# Altium PCB 4-Port_USB_HUB_PCB.PcbDoc
Units mm, origin at the board's own origin, x right, y up, seen from the top; angles counter-clockwise.
Board outline 70.66 x 70.66 mm, 2 copper layers (Top Layer, Bottom Layer), stack 1.569 mm thick; 29 components, 18 nets, 124 pads, 45 vias.
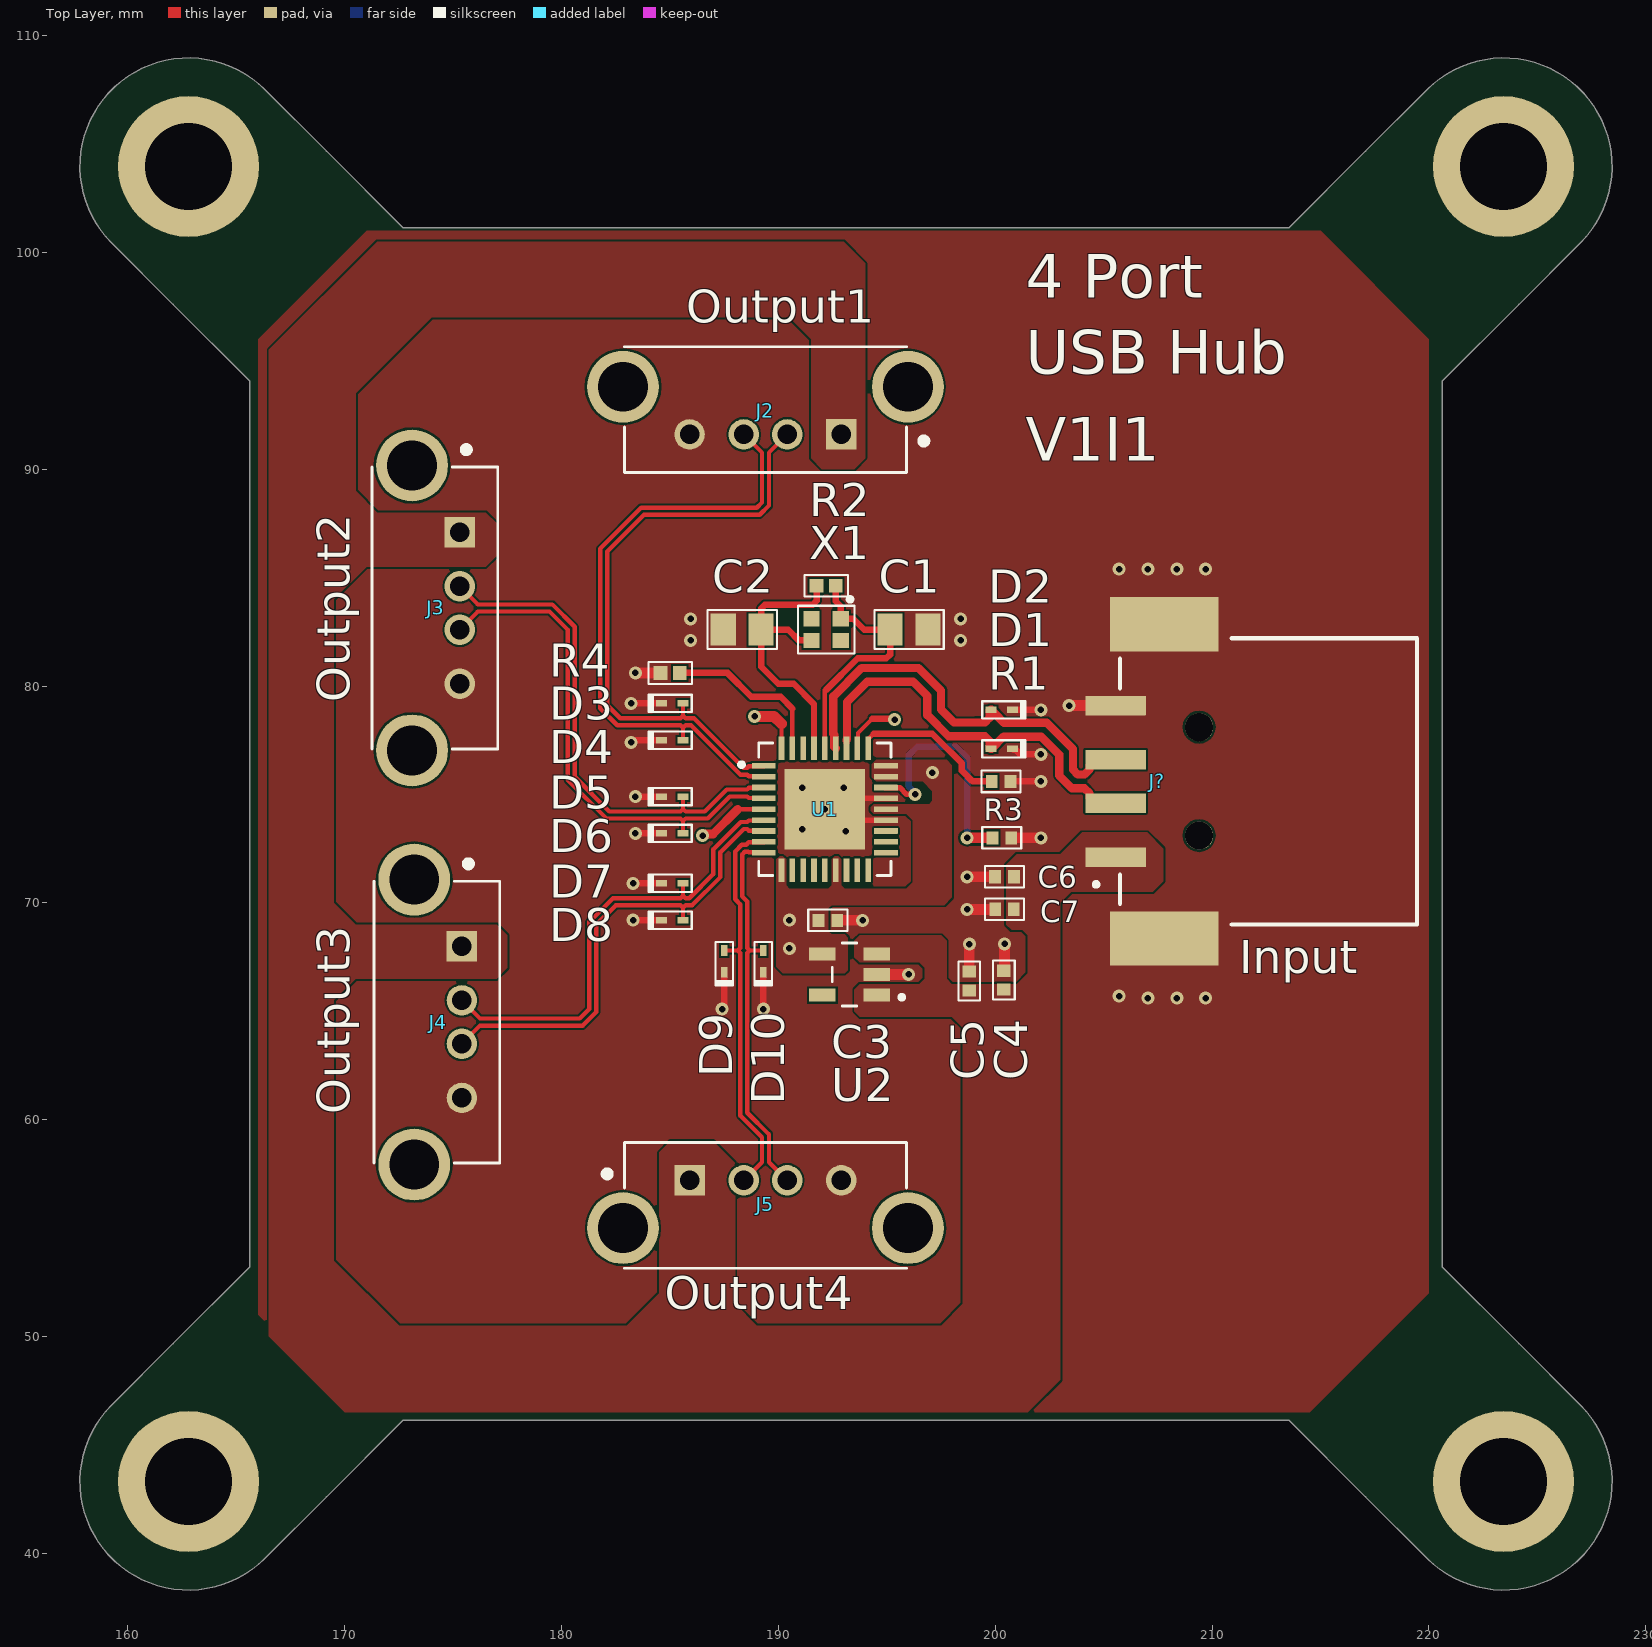
[diagram p0: Top Layer view]
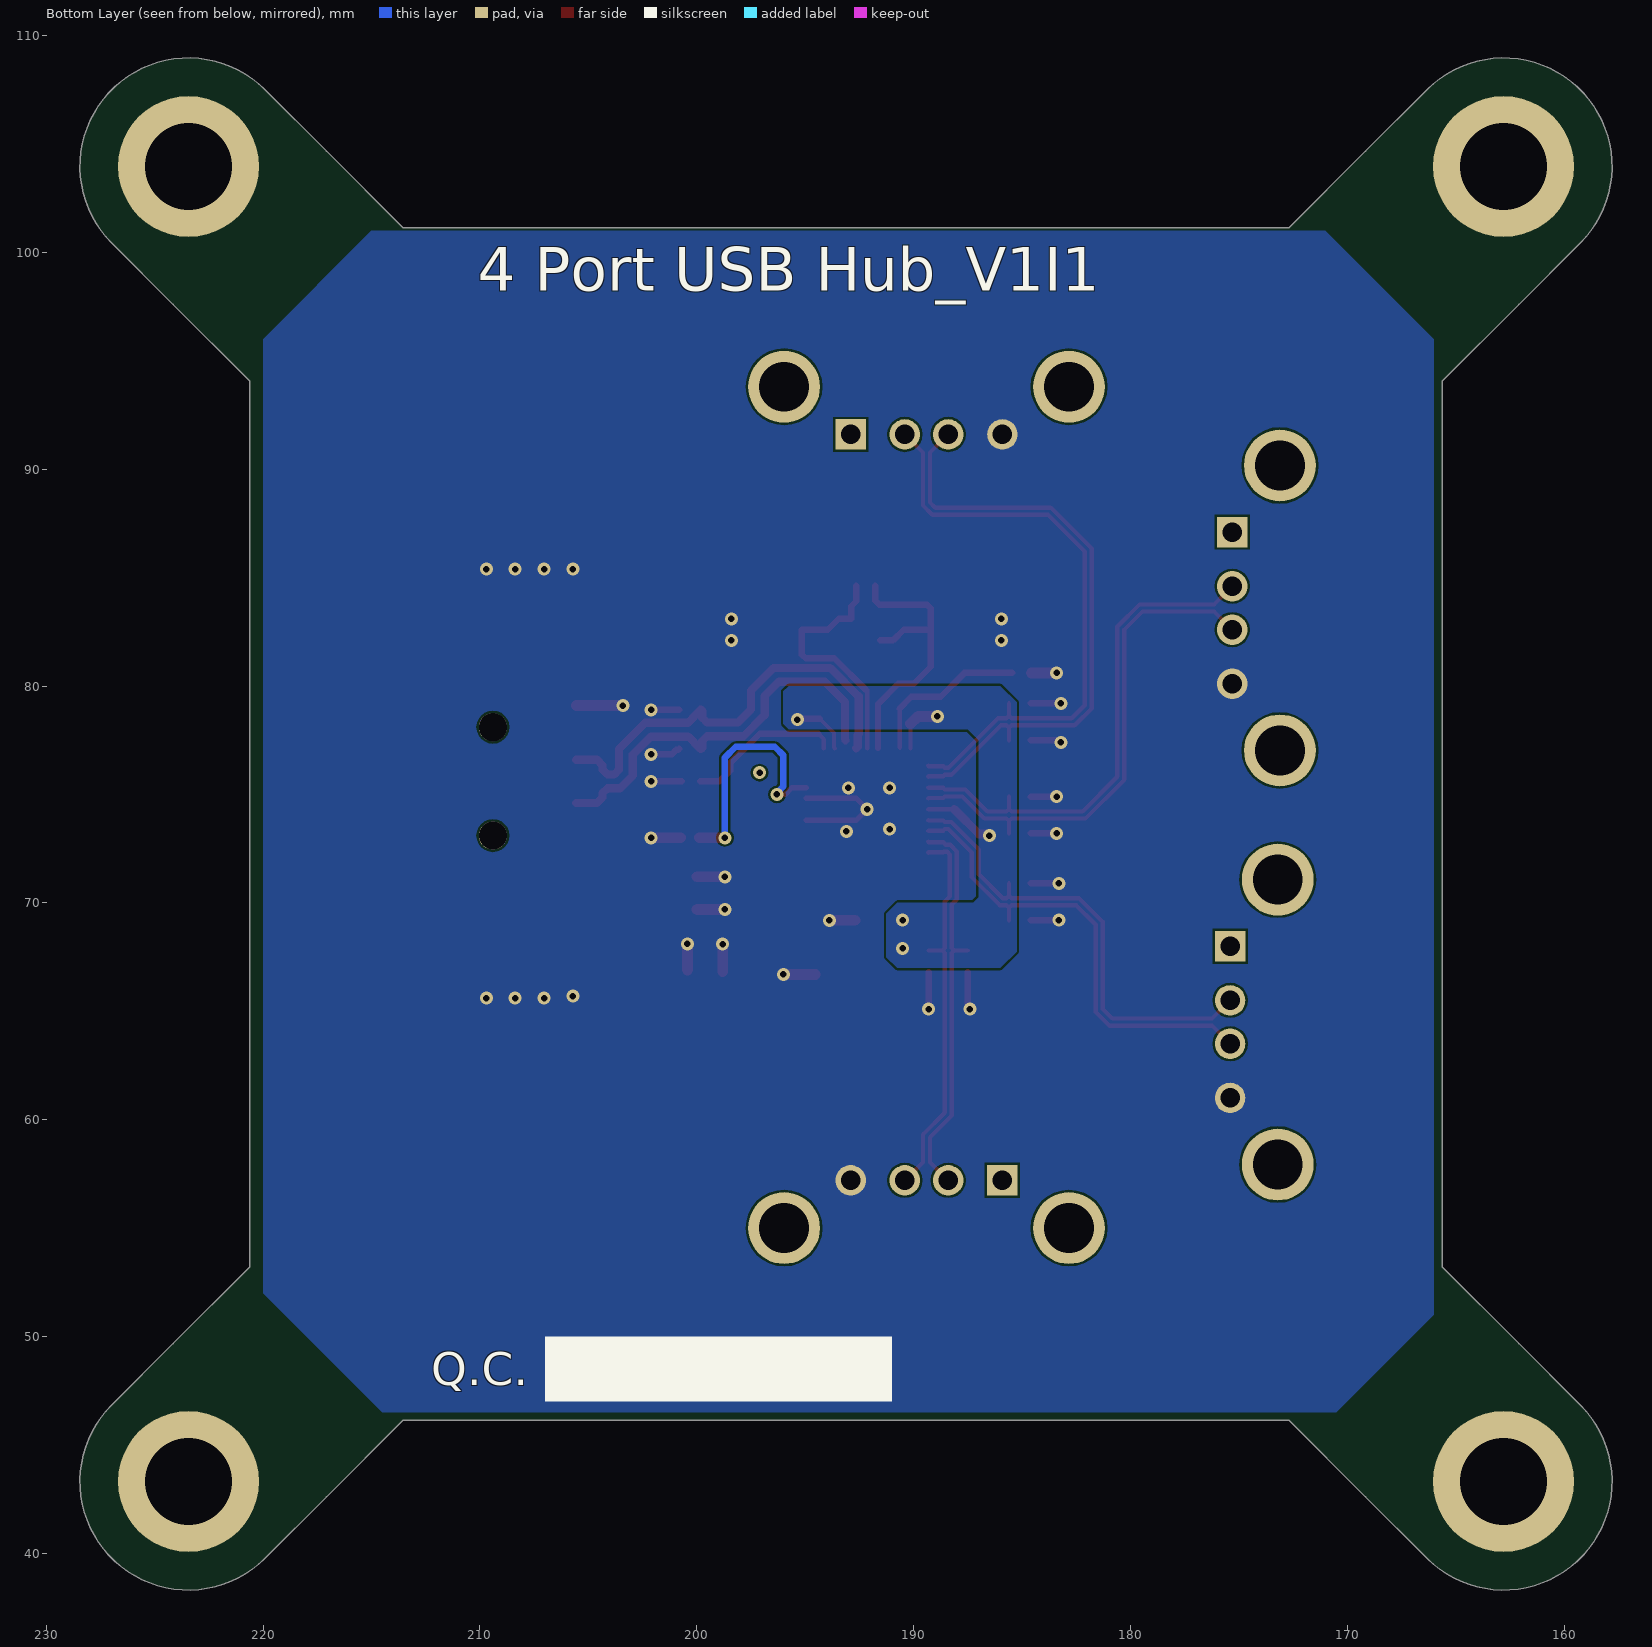
[diagram p1: Bottom Layer view, seen from below]
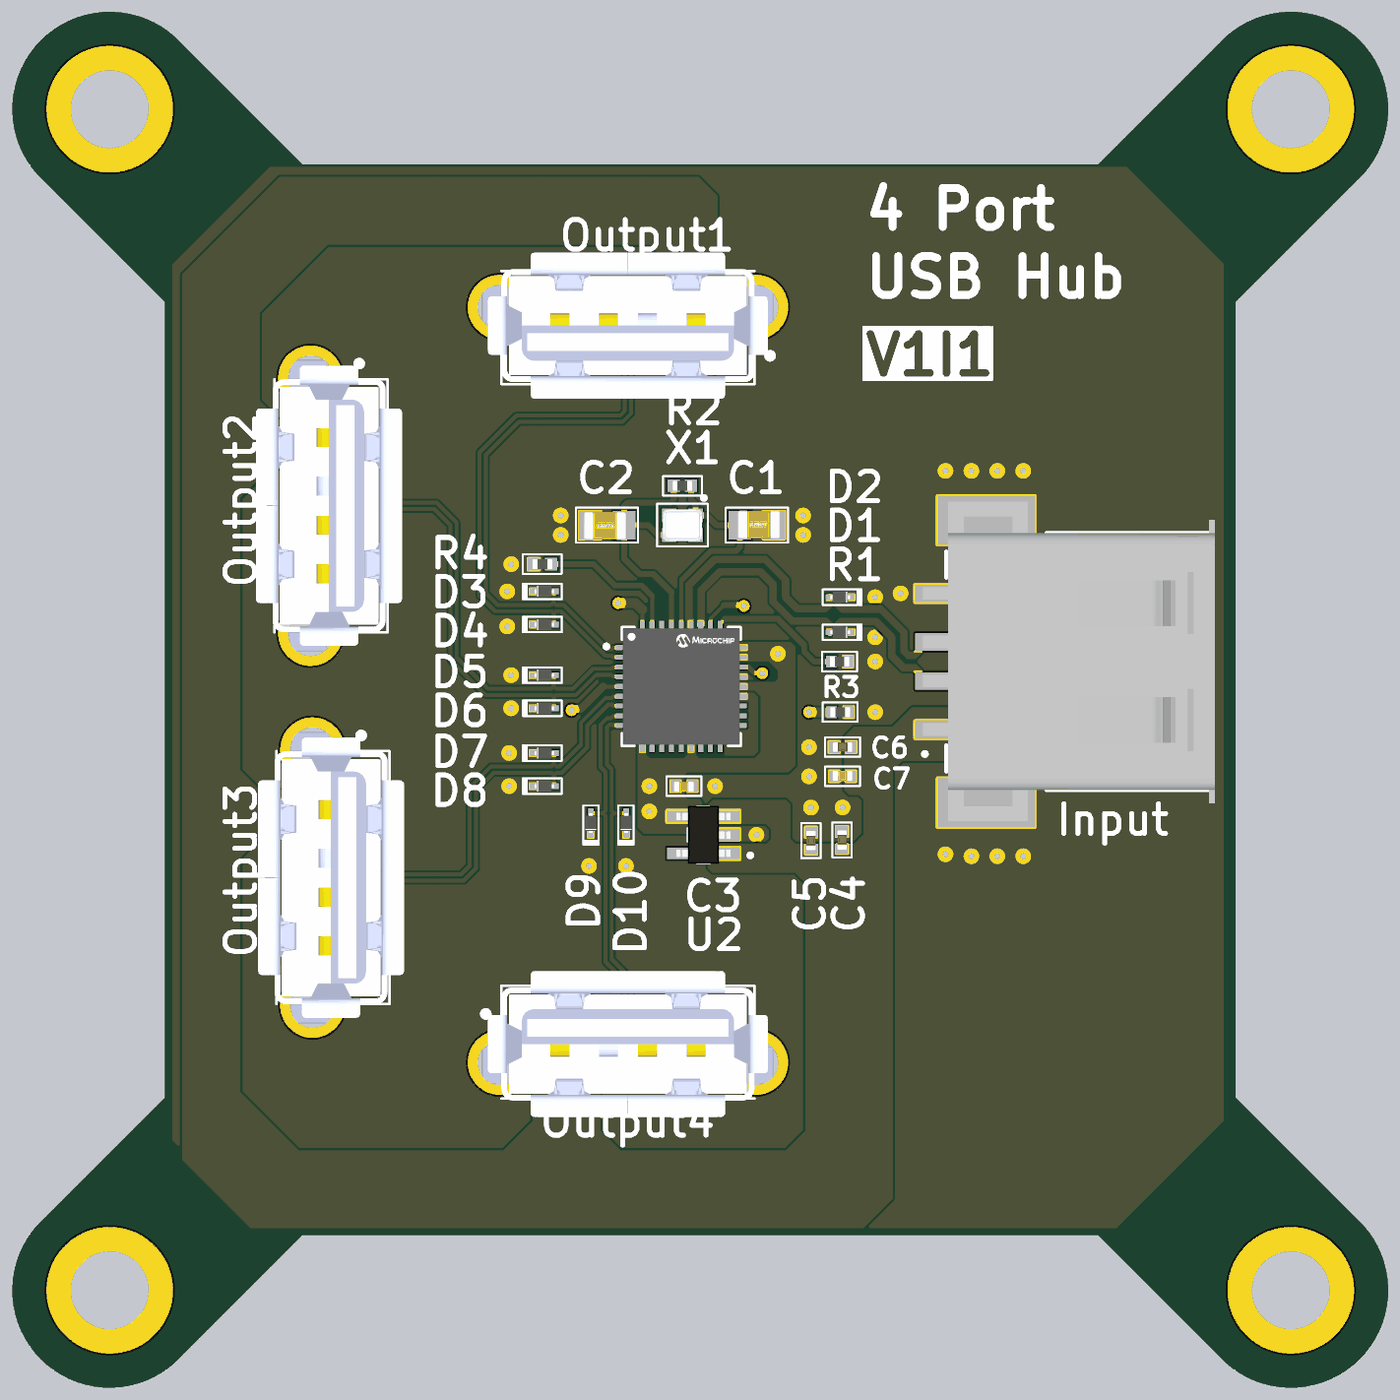
[diagram p2: 3D render of the assembled board from above, using the file's embedded part models]

## Layer stack, top to bottom
Top Solder: solder mask 0.0254, SM-001, Dk 4
Top Layer: signal copper 0.035
Dielectric 1: core 1.4986, Core-043, Dk 4.3
Bottom Layer: signal copper 0.035
Bottom Solder: solder mask 0.0254, SM-001, Dk 4

## Board outline
159.25,46.843 ccw(c162.786,43.307) 166.321,39.772 169.15,42.6 172.685,46.136 213.543,46.136 217.078,42.6 219.907,39.772 ccw(c223.442,43.307) 226.978,46.843 224.15,49.671 220.614,53.207 220.614,94.065 224.15,97.6 226.978,100.429 ccw(c223.442,103.964) 219.907,107.5 217.078,104.671 213.543,101.136 172.685,101.136 169.15,104.671 166.321,107.5 ccw(c162.786,103.964) 159.25,100.429 162.078,97.6 165.614,94.065 165.614,53.207 162.078,49.671

## Design rules (kind name [scope] priority, off if disabled: settings)
Clearance [All] p1: gap=0.1 ignorepadtopadclearanceinfootprint=FALSE
DiffPairsRouting DiffPair_DiffPairsRouting [InDifferentialPairClass('diff90')] p1: maxlimit=0.254 minlimit=0.254 mostfreqgap=0.254 toplayer_minwidth=0.381 toplayer_maxwidth=0.381 toplayer_prefwidth=0.381 bottomlayer_minwidth=0.381 bottomlayer_maxwidth=0.381 bottomlayer_prefwidth=0.381 maxuncoupledlength=12.7
DiffPairsRouting DiffPair_diff4_90DiffPairsRouting [InDifferentialPairClass('diff4_90')] p2: maxlimit=0.125 minlimit=0.125 mostfreqgap=0.125 toplayer_minwidth=0.2 toplayer_maxwidth=0.2 toplayer_prefwidth=0.2 bottomlayer_minwidth=0.2 bottomlayer_maxwidth=0.2 bottomlayer_prefwidth=0.2 maxuncoupledlength=12.7
DiffPairsRouting DiffPair_diff3_90DiffPairsRouting [InDifferentialPairClass('diff3_90')] p3: maxlimit=0.125 minlimit=0.125 mostfreqgap=0.125 toplayer_minwidth=0.2 toplayer_maxwidth=0.2 toplayer_prefwidth=0.2 bottomlayer_minwidth=0.2 bottomlayer_maxwidth=0.2 bottomlayer_prefwidth=0.2 maxuncoupledlength=12.7
DiffPairsRouting DiffPair_diff2_90DiffPairsRouting [InDifferentialPairClass('diff2_90')] p4: maxlimit=0.125 minlimit=0.125 mostfreqgap=0.125 toplayer_minwidth=0.2 toplayer_maxwidth=0.2 toplayer_prefwidth=0.2 bottomlayer_minwidth=0.2 bottomlayer_maxwidth=0.2 bottomlayer_prefwidth=0.2 maxuncoupledlength=12.7
DiffPairsRouting DiffPair_diff1_90DiffPairsRouting [InDifferentialPairClass('diff1_90')] p5: maxlimit=0.125 minlimit=0.125 mostfreqgap=0.125 toplayer_minwidth=0.2 toplayer_maxwidth=0.2 toplayer_prefwidth=0.2 bottomlayer_minwidth=0.2 bottomlayer_maxwidth=0.2 bottomlayer_prefwidth=0.2 maxuncoupledlength=12.7
DiffPairsRouting DiffPair_diff90DiffPairsRouting [InDifferentialPairClass('diff90')] p6: maxlimit=0.127 minlimit=0.127 mostfreqgap=0.127 toplayer_minwidth=0.552 toplayer_maxwidth=0.552 toplayer_prefwidth=0.58 bottomlayer_minwidth=0.552 bottomlayer_maxwidth=0.552 bottomlayer_prefwidth=0.58 impedanceprofiledriven=TRUE maxuncoupledlength=12.7
DiffPairsRouting DiffPairsRouting_1 [InDifferentialPairClass('diff90')] p7: maxlimit=0.254 minlimit=0.254 mostfreqgap=0.254 toplayer_minwidth=0.381 toplayer_maxwidth=0.381 toplayer_prefwidth=0.381 bottomlayer_minwidth=0.381 bottomlayer_maxwidth=0.381 bottomlayer_prefwidth=0.381 maxuncoupledlength=12.7
DiffPairsRouting DiffPair_diff90DiffPairsRouting_1 [InDifferentialPairClass('diff90')] p8 off: maxlimit=0.127 minlimit=0.127 mostfreqgap=0.127 toplayer_minwidth=0.55 toplayer_maxwidth=0.55 toplayer_prefwidth=0.55 bottomlayer_minwidth=0.55 bottomlayer_maxwidth=0.55 bottomlayer_prefwidth=0.55 maxuncoupledlength=12.7
DiffPairsRouting [All] p9: maxlimit=0.254 minlimit=0.254 mostfreqgap=0.254 toplayer_minwidth=0.381 toplayer_maxwidth=0.381 toplayer_prefwidth=0.381 bottomlayer_minwidth=0.381 bottomlayer_maxwidth=0.381 bottomlayer_prefwidth=0.381 maxuncoupledlength=12.7
HoleToHoleClearance [All] p1: gap=0.1 allowstackedmicrovias=TRUE
MatchedLengths DiffPair_MatchedLengths [InDifferentialPairClass('diff90')] p1: tolerance=25.4 checknetsindiffpair=FALSE checkdiffpairvsdiffpair=TRUE checkxsignals=TRUE checkothers=TRUE
MatchedLengths DiffPair_diff4_90MatchedLengths [InDifferentialPairClass('diff4_90')] p2: tolerance=25.4 checknetsindiffpair=FALSE checkdiffpairvsdiffpair=TRUE checkxsignals=TRUE checkothers=TRUE
MatchedLengths DiffPair_diff3_90MatchedLengths [InDifferentialPairClass('diff3_90')] p3: tolerance=25.4 checknetsindiffpair=FALSE checkdiffpairvsdiffpair=TRUE checkxsignals=TRUE checkothers=TRUE
MatchedLengths DiffPair_diff2_90MatchedLengths [InDifferentialPairClass('diff2_90')] p4: tolerance=25.4 checknetsindiffpair=FALSE checkdiffpairvsdiffpair=TRUE checkxsignals=TRUE checkothers=TRUE
MatchedLengths DiffPair_diff1_90MatchedLengths [InDifferentialPairClass('diff1_90')] p5: tolerance=25.4 checknetsindiffpair=FALSE checkdiffpairvsdiffpair=TRUE checkxsignals=TRUE checkothers=TRUE
MatchedLengths DiffPair_diff90MatchedLengths [InDifferentialPairClass('diff90')] p6: tolerance=25.4 checknetsindiffpair=FALSE checkdiffpairvsdiffpair=TRUE checkxsignals=TRUE checkothers=TRUE
MatchedLengths [InDifferentialPairClass('diff90')] p7: tolerance=25.4 checknetsindiffpair=FALSE checkdiffpairvsdiffpair=TRUE checkxsignals=TRUE checkothers=TRUE
MatchedLengths DiffPair_diff90MatchedLengths_1 [InDifferentialPairClass('diff90')] p8 off: tolerance=25.4 checknetsindiffpair=FALSE checkdiffpairvsdiffpair=TRUE checkxsignals=TRUE checkothers=TRUE
MinimumSolderMaskSliver [All] p1: minsoldermaskwidth=0.1
PolygonConnect [All] p1: connectstyle=Direct reliefconductorwidth=0.254 reliefentries=4 polygonreliefangle="90 Angle" airgapwidth=0.254
RoutingVias [All] p1: holewidth=0.3 width=0.6 viastyle="Through Hole" minholewidth=0.3 minwidth=0.6 maxholewidth=0.3 maxwidth=0.6
SilkToSilkClearance [All] p1: silktosilkclearance=0.1
SilkToSolderMaskClearance [IsPad] p1: minsilkscreentomaskgap=0.1 clearancetoexposedcopper=TRUE
SolderMaskExpansion [All] p1: expansion=0.102 istentingtop=FALSE
Width [All] p1: maxlimit=10 minlimit=0.1 preferedwidth=0.254
25 further rules are at their usual default settings.

## Classes and differential pairs
differential pair class diff4_90: Out4
differential pair class diff3_90: Out3
differential pair class diff2_90: Out2
differential pair class diff1_90: Out1
differential pair class diff90: IN
differential pair Out4: +Out4_P -Out4_N
differential pair Out3: +Out3_P -Out3_N
differential pair Out2: +Out2_P -Out2_N
differential pair Out1: +Out1_P -Out1_N
differential pair IN: +IN_P -IN_N

## Components (designator, comment, footprint, x,y, rotation, side; value= is the part's Value field where it differs from the comment)
C1 "18pF,50V" 18pF 196.025,82.6 r0 top
C2 "18pF,50V" 18pF 188.325,82.6 r180 top
C3 "1uF,6.3V" 1uF_CAP 192.276,69.196 r0 top
C4 "4.7uF,6.3V" 4.7uF_CAP 200.397,66.435 r90 top
C5 "4.7uF,6.3V" 4.7uF_CAP 198.8,66.4 r90 top
C6 "4.7uF,6.3V" 4.7uF_CAP 200.424,71.204 r180 top
C7 "1uF,6.3V" 1uF_CAP 200.424,69.704 r180 top
D1 "TVS" "ESD Diode" 200.3,77.1 r180 top
D2 "TVS" "ESD Diode" 200.3,78.9 r180 top
D3 "TVS" "ESD Diode" 185.1,79.2 r0 top
D4 "TVS" "ESD Diode" 185.1,77.5 r0 top
D5 "TVS" "ESD Diode" 185.1,74.9 r0 top
D6 "TVS" "ESD Diode" 185.1,73.2 r0 top
D7 "TVS" "ESD Diode" 185.1,70.9 r0 top
D8 "TVS" "ESD Diode" 185.1,69.2 r0 top
D9 "TVS" "ESD Diode" 187.5,67.3 r90 top
D10 "TVS" "ESD Diode" 189.3,67.3 r90 top
J2 "USB-A" USB_Connector 192.9,91.6 r180 top
J3 "USB-A" USB_Connector 175.3,87.1 r270 top
J4 "USB-A" USB_Connector 175.4,68 r270 top
J5 "USB-A" USB_Connector 185.9,57.2 r0 top
J? "SMD USB-A" "SMD USB-A" 209.4,75.6 r90 top
R1 "56K" 56K 200.268,75.6 r0 top
R2 "1M" "1M Res" 192.2,84.625 r270 top
R3 "56K" 56K 200.3,73 r0 top
R4 "12K" "1M Res" 185.005,80.6 r270 top
U1 "USB2514B-I/M2" IC_microchip 192.138,74.316 r0 top
U2 "MIC5504-3.3YM5-TR" "Voltage Regulator" 193.276,66.696 r180 top
X1 "24MHz" Crystal 192.2,82.6 r270 top

## Footprints (in the part's own frame and the unit in brackets; to place one, negate y for a bottom-side part, rotate by r counter-clockwise, add the part's x,y. Pads: shape width x height; smd on the part's side, far side on the other; paste and mask are expansions set on the pad)
"1M Res" [mil]
  rect 25x25 smd mask+2: 1(0,17.5) 2(0,-17.5)
  silkscreen extent -20,-39 20,39, body extent -10,-20 10,20, height 16
1uF_CAP [mm]
  rect 0.54x0.6 smd mask+0.051: 1(-0.43,0) 2(0.43,0)
  silkscreen extent -0.9,-0.5 0.9,0.5, body extent -0.52,-0.3 0.52,0.25, height 0.55
4.7uF_CAP [mm]
  rect 0.56x0.63 smd mask+0.051: 1(-0.435,0) 2(0.435,0)
  silkscreen extent -0.9,-0.5 0.9,0.5, body extent -0.5,-0.25 0.5,0.25, height 0.6
18pF [mm]
  rect 1.16x1.47 smd mask+0.051: 1(-0.875,0) 2(0.875,0)
  silkscreen extent -1.6,-0.9 1.6,0.9, body extent -1,-0.7 1.2,0.75, height 0.92
56K [mm]
  rect 0.54x0.6 smd mask+0.051: 1(-0.432,0) 2(0.432,0)
  silkscreen extent -0.9,-0.5 0.9,0.5, body extent -0.5,-0.25 0.5,0.25, height 0.4
Crystal [mm]
  rect 0.7x0.75 smd mask+0.051: 1(-0.5,0.675) 2(-0.5,-0.675) 3(0.5,-0.675) 4(0.5,0.675)
  silkscreen extent -1.5,-1.3 1.1,1.3, body extent -0.8,-1 0.8,1, height 0.7
"ESD Diode" [mm]
  rect 0.5x0.3 smd mask+0.051: 1(-0.5,0) 2(0.5,0)
  silkscreen extent -1.1,-0.4 0.9,0.4, body extent -0.5,-0.3 0.5,0.3, height 0.4
IC_microchip [mm]
  rrect7% 1.1x0.26 smd mask+0.051: 1(-2.815,2) 2(-2.815,1.5) 3(-2.815,1) 4(-2.815,0.5) 5(-2.815,0) 6(-2.815,-0.5) 7(-2.815,-1) 8(-2.815,-1.5) 9(-2.815,-2) 19(2.815,-2) 20(2.815,-1.5) 21(2.815,-1) 22(2.815,-0.5) 23(2.815,0) 24(2.815,0.5) 25(2.815,1) 26(2.815,1.5) 27(2.815,2)
  rrect7% 0.26x1.1 smd mask+0.051: 10(-2,-2.815) 11(-1.5,-2.815) 12(-1,-2.815) 13(-0.5,-2.815) 14(0,-2.815) 15(0.5,-2.815) 16(1,-2.815) 17(1.5,-2.815) 18(2,-2.815) 28(2,2.815) 29(1.5,2.815) 30(1,2.815) 31(0.5,2.815) 32(0,2.815) 33(-0.5,2.815) 34(-1,2.815) 35(-1.5,2.815) 36(-2,2.815)
  rect 3.7x3.7 smd paste-3 mask+0.051: 37(0,0)
  silkscreen extent -3.94,-3.05 3.05,3.05, body extent -3,-3 3,3, height 1
"SMD USB-A" [mm]
  rrect4% 0.9x2.8 smd: 1(-3.5,3.85) 2(-1,3.85) 3(1,3.85) 4(3.5,3.85)
  rect 2.5x5 smd: S1(-7.25,1.6) S2(7.25,1.6)
  round 1.3 hole 1.3 unplated: ""(-2.5,0) ""(2.5,0)
  silkscreen extent -6.6,-10.05 6.6,4.85, body extent -8.2,-10.15 8.2,4.85, height 7.8
USB_Connector [mm]
  rect 1.408x1.408 hole 0.9: 1(0,0)
  round 1.408 hole 0.9: 2(2.5,0) 3(4.5,0) 4(7,0)
  round 3.316 hole 2.3: SH1(-3.07,-2.2) SH2(10.07,-2.2)
  silkscreen extent -3.95,-4.05 10,1.75, body extent -4,-5 11,2.5, height 15
"Voltage Regulator" [mm]
  rect 1.21x0.59 smd: 1(-1.255,0.95) 2(-1.255,0) 3(-1.255,-0.95) 4(1.255,-0.95) 5(1.255,0.95)
  silkscreen extent -2.51,-1.45 0.8,1.45, body extent -1.4,-1.5 1.4,1.49, height 1.18

## Part data
C1 C2: library part C0805C180J5GACTU, "18PF 50V 0805", Capacitance=18pF, Case Code (Imperial)=0805, Case Code (Metric)=2012, Dielectric=C0G, Dielectric Material=Ceramic, Manufacturer=KEMET, Max Operating Temperature=125°C, Min Operating Temperature=-55°C, Package Quantity=1, Supplier Part Number 1=399-1112-1-ND, Temperature Coefficient=30ppm/°C, Tolerance=5%, Voltage=50V, Case/Package=0805, Category="Ceramic Capacitors", ComponentLink1Description=https://datasheet.ciiva.com/22746/1769375-22746770.pdf?src-supplier=Element14, ComponentLink1URL=https://datasheet.ciiva.com/22746/1769375-22746770.pdf?src-supplier=Element14, ComponentLink2Description=https://datasheet.ciiva.com/26923/getdatasheetpartid-759702-26923980.pdf?src-supplier=Verical, ComponentLink2URL=https://datasheet.ciiva.com/26923/getdatasheetpartid-759702-26923980.pdf?src-supplier=Verical, ComponentLink3Description=https://datasheet.ciiva.com/26847/getdatasheetpartid-385668-26847862.pdf?src-supplier=Verical, ComponentLink3URL=https://datasheet.ciiva.com/26847/getdatasheetpartid-385668-26847862.pdf?src-supplier=Verical, Construction=Flat, Contact Material=Tin, Contact Plating=Tin,Matte, Depth=1.25mm, Dissipation Factor=0.1%, Height=0.78mm, Lead Free="Lead Free", Lead Pitch=0.75mm, Length=2mm, Manufacturer Part Number=C0805C180J5GACTU, Mount="Surface Mount,PCB", Number of Pins=2, Packaging="Tape and Reel", Pricing 1="1=0.13000, 10=0.09000, 50=0.05140, 100=0.04250, 500=0.02982, 1000=0.02468 (USD)", Radiation Hardening=No, REACH SVHC="No SVHC", RoHS=Yes, RoHS Compliant=Yes, Series=C, Stock 1=4285, Supplier 1=Digi-Key, Termination=SMD/SMT, Thickness=0.035inch, Voltage Rating=50V, Voltage Rating (DC)=50V, Width=1.2mm
C3 C7: library part C0402C105K9PACTU, "1uF 6.3V 0402", Capacitance=1uF, Case Code (Imperial)=0402, Dielectric=X5R, Dielectric Material=Ceramic, Manufacturer=KEMET, Max Operating Temperature=85°C, Min Operating Temperature=-55°C, Package Quantity=1, Supplier Part Number 1=399-4873-1-ND, Tolerance=10%, Voltage=6.3V, Case/Package=0402, Category="Ceramic Capacitors", ComponentLink1Description=https://datasheet.ciiva.com/28645/1789732-28645392.pdf?src-supplier=Element14, ComponentLink1URL=https://datasheet.ciiva.com/28645/1789732-28645392.pdf?src-supplier=Element14, ComponentLink2Description=https://datasheet.ciiva.com/7747/kem-c1006-x5r-smd-7747445.pdf?src-supplier=Element14, ComponentLink2URL=https://datasheet.ciiva.com/7747/kem-c1006-x5r-smd-7747445.pdf?src-supplier=Element14, ComponentLink3Description=https://datasheet.ciiva.com/7747/40889-7747623.pdf?src-supplier=Element14, ComponentLink3URL=https://datasheet.ciiva.com/7747/40889-7747623.pdf?src-supplier=Element14, ComponentLink4Description=https://datasheet.ciiva.com/18192/getdatasheetpartid-127800-18192427.pdf?src-supplier=Verical, ComponentLink4URL=https://datasheet.ciiva.com/18192/getdatasheetpartid-127800-18192427.pdf?src-supplier=Verical, Construction=Flat, Depth=0.5mm, Height=0.5mm, Lead Free="Lead Free", Lead Pitch=0.3mm, Length=1mm, Manufacturer Part Number=C0402C105K9PACTU, Mount="Surface Mount", Number of Pins=2, Packaging="Tape and Reel", Pricing 1="1=0.10000, 10=0.02400, 50=0.01320, 100=0.01070, 500=0.00764, 1000=0.00601, 2500=0.00546, 5000=0.00503 (USD)", Radiation Hardening=No, REACH SVHC="No SVHC", RoHS=Yes, RoHS Compliant=Yes, Series=C, Stock 1=252140, Supplier 1=Digi-Key, Termination=SMD/SMT, Thickness=0.022inch, Voltage Rating=6.3V, Voltage Rating (DC)=6.3V, Width=0.02inch
C4 C5 C6: library part GRM155R60J475ME47D, "4.7uF 6.3V 0402", Capacitance=4.7uF, Case Code (Imperial)=0402, Case Code (Metric)=1005, Dielectric=X5R, Manufacturer=Murata, Max Operating Temperature=85°C, Min Operating Temperature=-55°C, Package Quantity=10000, Supplier Part Number 1=8145230P, Tolerance=20%, Voltage=6.3V, Case/Package=0402, Category="Ceramic Capacitors", ComponentLink1Description=https://datasheet.ciiva.com/6270/product-6270483.pdf?src-supplier=Digi-Key, ComponentLink1URL=https://datasheet.ciiva.com/6270/product-6270483.pdf?src-supplier=Digi-Key, ComponentLink2Description=https://datasheet.ciiva.com/6268/partnumbering-e-01-6268378.pdf?src-supplier=Digi-Key, ComponentLink2URL=https://datasheet.ciiva.com/6268/partnumbering-e-01-6268378.pdf?src-supplier=Digi-Key, ComponentLink3Description=https://datasheet.ciiva.com/46418/1769893-46418044.pdf?src-supplier=Element14, ComponentLink3URL=https://datasheet.ciiva.com/46418/1769893-46418044.pdf?src-supplier=Element14, ComponentLink4Description=https://datasheet.ciiva.com/46418/1769893-46418045.pdf?src-supplier=Element14, ComponentLink4URL=https://datasheet.ciiva.com/46418/1769893-46418045.pdf?src-supplier=Element14, ComponentLink5Description=https://datasheet.ciiva.com/6268/partnumbering-e-01-6268382.pdf?src-supplier=Digi-Key, ComponentLink5URL=https://datasheet.ciiva.com/6268/partnumbering-e-01-6268382.pdf?src-supplier=Digi-Key, Contact Plating=Tin, Depth=0.5mm, Height=0.5mm, Lead Free="Lead Free", Length=1mm, Manufacturer Part Number=GRM155R60J475ME47D, Mount="Surface Mount", Packaging="Cut Tape", Pricing 1="50=0.07500, 500=0.02600, 2500=0.02500, 5000=0.02500, 10000=0.02300 (USD)", REACH SVHC="No SVHC", RoHS=Yes, RoHS Compliant=Yes, Series=GRM, Stock 1=42550, Supplier 1=RSComponents, Termination=Standard, Thickness=0.022inch, Voltage Rating=6.3V, Voltage Rating (DC)=6.3V, Weight=0.000212oz, Width=0.5mm
D1 D2 D3 D4 D5 D6 D7 D8 D9 D10: library part ESD9B3.3ST5G, "TVS Diode", Breakdown Voltage=5V, Capacitance=15pF, Case/Package=SOD-923-2, Clamping Voltage=10.5V, Leakage Current=1uA, Manufacturer="ON Semiconductor", Max Operating Temperature=150°C, Max Power Dissipation=300mW, Min Operating Temperature=-55°C, Operating Supply Voltage=3.3V, Package Quantity=1, Peak Pulse Current=2A, Power Line Protection=No, Resistor Type=Zener, Supplier Part Number 1=ESD9B3.3ST5GOSCT-ND, Test Current=1mA, Category="ESD and Circuit Protection ICs", ComponentLink1Description=https://datasheet.ciiva.com/339/esd9b-d-339712.pdf?src-supplier=Digi-Key, ComponentLink1URL=https://datasheet.ciiva.com/339/esd9b-d-339712.pdf?src-supplier=Digi-Key, ComponentLink2Description=https://datasheet.ciiva.com/339/esd9b-d-339712.pdf?src-supplier=Mouser, ComponentLink2URL=https://datasheet.ciiva.com/339/esd9b-d-339712.pdf?src-supplier=Mouser, ComponentLink3Description=https://datasheet.ciiva.com/25958/esd9b-d-25958117.pdf?src-supplier=Avnet+Europe, ComponentLink3URL=https://datasheet.ciiva.com/25958/esd9b-d-25958117.pdf?src-supplier=Avnet+Europe, ComponentLink4Description=https://datasheet.ciiva.com/339/esd9b-d-339713.pdf?src-supplier=Digi-Key, ComponentLink4URL=https://datasheet.ciiva.com/339/esd9b-d-339713.pdf?src-supplier=Digi-Key, ComponentLink5Description=https://datasheet.ciiva.com/339/esd9b-d-339714.pdf?src-supplier=Digi-Key, ComponentLink5URL=https://datasheet.ciiva.com/339/esd9b-d-339714.pdf?src-supplier=Digi-Key, ComponentLink6Description=https://datasheet.ciiva.com/22642/1596367-22642026.pdf?src-supplier=Element14, ComponentLink6URL=https://datasheet.ciiva.com/22642/1596367-22642026.pdf?src-supplier=Element14, ComponentLink7Description=https://datasheet.ciiva.com/26917/getdatasheetpartid-292713-26917946.pdf?src-supplier=Verical, ComponentLink7URL=https://datasheet.ciiva.com/26917/getdatasheetpartid-292713-26917946.pdf?src-supplier=Verical, ComponentLink8Description=https://datasheet.ciiva.com/22642/1596367-22642028.pdf?src-supplier=Element14, ComponentLink8URL=https://datasheet.ciiva.com/22642/1596367-22642028.pdf?src-supplier=Element14, ComponentLink9Description=https://datasheet.ciiva.com/11193/esd9b-d-11193999.pdf?src-supplier=Avnet, ComponentLink9URL=https://datasheet.ciiva.com/11193/esd9b-d-11193999.pdf?src-supplier=Avnet, Contact Plating=Tin,Matte, Depth=0.6mm, Diode Type=ZENER, Direction=Bidirectional, Element Configuration=Single, ESD Protection=Yes, Halogen Free="Halogen Free", Height=0.4mm, Lead Free="Lead Free", Length=0.8mm, Manufacturer Part Number=ESD9B3.3ST5G, Max Reverse Leakage Current=1uA, Min Breakdown Voltage=5V, Number of Bidirectional Channels=1, Number of Channels=1, Number of Elements=1, Number of Lines=1, Number of Pins=2, Packaging="Tape and Reel", Peak Pulse Power=300mW, Polarity=Bidirectional, Pricing 1="1=0.23000, 10=0.18500, 100=0.09790, 500=0.06440, 1000=0.04379, 2000=0.03950 (USD)", Radiation Hardening=No, REACH SVHC="No SVHC", Reverse Breakdown Voltage=5V, Reverse Standoff Voltage=3.3V, RoHS=Yes, RoHS Compliant=Yes, Series="Automotive, AEC-Q101", Stock 1=6111, Supplier 1=Digi-Key, Termination=SMD/SMT, Width=0.65mm, Working Voltage=3.3V
J2 J3 J4 J5: library part KUSBVX-AS1N-B30, "Conn USB SKT 4 POS Solder ST Thru-Hole 4 Terminal 1 Port", Color=Black, Current Rating=1A, Flammability Rating="UL94 V-0", Insulation Resistance=1GR, Manufacturer=Kycon, Package Quantity=120, Supplier Part Number 1=2092-KUSBVX-AS1N-B30-ND, Category="USB Connectors", ComponentLink1Description=https://datasheet.ciiva.com/16668/kusbvx-as1n-xxx-16668448.pdf?src-supplier=Avnet+Europe, ComponentLink1URL=https://datasheet.ciiva.com/16668/kusbvx-as1n-xxx-16668448.pdf?src-supplier=Avnet+Europe, ComponentLink2Description=https://datasheet.ciiva.com/4599/kusbvx-334767-4599050.pdf?src-supplier=Mouser, ComponentLink2URL=https://datasheet.ciiva.com/4599/kusbvx-334767-4599050.pdf?src-supplier=Mouser, ComponentLink3Description=https://datasheet.ciiva.com/3095/kusbvx-as1n-xxx-3095637.pdf?src-supplier=Avnet, ComponentLink3URL=https://datasheet.ciiva.com/3095/kusbvx-as1n-xxx-3095637.pdf?src-supplier=Avnet, Connector Type=USB,Receptacle, Contact Material=Bronze, Contact Plating=Gold, Gender=Female, Housing Material=Thermoplastic, Insulation Color=Black, Manufacturer Part Number=KUSBVX-AS1N-B30, Mount="Through Hole", Number of Contacts=4, Number of Ports=1, Number of Positions=4, Orientation=Straight, Packaging=Tray, Pricing 1="1=1.23000, 10=1.08400, 25=1.02040, 40=0.97800, 80=0.93550, 230=0.85043, 440=0.76539, 945=0.68034, 2400=0.61655 (USD)", Radiation Hardening=No, RoHS=Yes, RoHS Compliant=Yes, Series=KUSBVX, Stock 1=953, Supplier 1=Digi-Key, Termination=Solder
J?: library part USB-A-S-S-B-SM2, "USB - A USB 2.0 Receptacle Connector 4 Position Surface Mount, Right Angle, Horizontal", Manufacturer=Samtec, Max Operating Temperature=85°C, Max Voltage Rating (AC)=30V, Min Operating Temperature=-50°C, Package Quantity=1, Supplier Part Number 1=SAM10864-ND, Category=Connectors, ComponentLink1Description=https://datasheet.ciiva.com/851/usb-a-851788.pdf?src-supplier=Digi-Key, ComponentLink1URL=https://datasheet.ciiva.com/851/usb-a-851788.pdf?src-supplier=Digi-Key, Connector Type=USB, Contact Material=Bronze, Contact Plating=Gold, Depth=14.8mm, Gender=Receptacle, Housing Material=Thermoplastic, Length=16.4mm, Manufacturer Part Number=USB-A-S-S-B-SM2, Mount="Surface Mount,Horizontal", Number of Contacts=4, Number of Ports=1, Number of Terminals/Pins=4, Orientation="Right Angle", Packaging=Tray, Pricing 1="1=2.03000, 10=1.84300, 25=1.73040, 40=1.65525, 80=1.58000, 230=1.42952, 440=1.31668, 945=1.12858, 2400=1.05335 (USD)", Radiation Hardening=No, RoHS=Yes, RoHS Compliant=Yes, Series=USB-A, Stock 1=1137, Supplier 1=Digi-Key, Termination=Solder
R1 R3: library part RC0402JR-0756KL, Case Code (Imperial)=0402, Case Code (Metric)=1005, Manufacturer=Yageo, Max Operating Temperature=155°C, Max Power Dissipation=63mW, Min Operating Temperature=-55°C, Resistance=56kR, Resistance Tolerance=5%, Resistor Type="Thick Film", Supplier Part Number 1=311-56KJRCT-ND, Temperature Coefficient=100ppm/°C, Voltage Rating=50V, Case/Package=0402, Category="Chip SMD Resistors", ComponentLink1Description=https://datasheet.ciiva.com/7850/1018594-7850229.pdf?src-supplier=Element14, ComponentLink1URL=https://datasheet.ciiva.com/7850/1018594-7850229.pdf?src-supplier=Element14, ComponentLink2Description=https://datasheet.ciiva.com/12577/pyu-rc0402-51-rohs-l-6-r-12577526.pdf?src-supplier=Mouser, ComponentLink2URL=https://datasheet.ciiva.com/12577/pyu-rc0402-51-rohs-l-6-r-12577526.pdf?src-supplier=Mouser, ComponentLink3Description=https://datasheet.ciiva.com/15189/getdatasheetpartid-251833-15189574.pdf?src-supplier=Verical, ComponentLink3URL=https://datasheet.ciiva.com/15189/getdatasheetpartid-251833-15189574.pdf?src-supplier=Verical, ComponentLink4Description=https://datasheet.ciiva.com/16742/pyu-rc0402-51-rohs-l-6-r-16742167.pdf?src-supplier=Future+Electronics, ComponentLink4URL=https://datasheet.ciiva.com/16742/pyu-rc0402-51-rohs-l-6-r-16742167.pdf?src-supplier=Future+Electronics, ComponentLink5Description=https://datasheet.ciiva.com/7983/1018594-7983592.pdf?src-supplier=Element14, ComponentLink5URL=https://datasheet.ciiva.com/7983/1018594-7983592.pdf?src-supplier=Element14, ComponentLink6Description=https://datasheet.ciiva.com/16862/pyu-rc0402-51-rohs-l-6-16862495.pdf?src-supplier=Avnet+Europe, ComponentLink6URL=https://datasheet.ciiva.com/16862/pyu-rc0402-51-rohs-l-6-16862495.pdf?src-supplier=Avnet+Europe, Construction=Rectangular, Contact Plating=Tin,Matte, Depth=0.5mm, Features="Moisture Resistant", Height=0.35mm, Lead Free="Lead Free", Length=1mm, Manufacturer Part Number=RC0402JR-0756KL, Military Standard=Not, Number of Terminations=2, Packaging="Tape and Reel", Power Rating=63mW, Pricing 1="1=0.10000, 10=0.01300, 100=0.00540, 1000=0.00244, 2500=0.00212, 5000=0.00175 (USD)", Radiation Hardening=No, REACH SVHC=Unknown, RoHS=Yes, RoHS Compliant=Yes, Series=RC, Stock 1=173524, Supplier 1=Digi-Key, Technology="THICK FILM", Termination=SMD/SMT, Tolerance=5%, Weight=2.3E-05oz, Width=0.5mm, Working Voltage=50V
R2: library part RC0402FR-071ML, "1M OHM", Case Code (Imperial)=0402, Case Code (Metric)=1005, Manufacturer=Yageo, Max Operating Temperature=155°C, Max Power Dissipation=63mW, Min Operating Temperature=-55°C, Resistance=1MR, Resistance Tolerance=1%, Resistor Type="Thick Film", Supplier Part Number 1=311-1.00MLRCT-ND, Temperature Coefficient=100ppm/°C, Voltage Rating=50V, Case/Package=0402, Category="Chip SMD Resistors", ComponentLink1Description=https://datasheet.ciiva.com/11808/0900766b80c66297-11808125.pdf?src-supplier=RSComponents, ComponentLink1URL=https://datasheet.ciiva.com/11808/0900766b80c66297-11808125.pdf?src-supplier=RSComponents, ComponentLink2Description=https://datasheet.ciiva.com/46394/1018594-46394951.pdf?src-supplier=Element14, ComponentLink2URL=https://datasheet.ciiva.com/46394/1018594-46394951.pdf?src-supplier=Element14, ComponentLink3Description=https://datasheet.ciiva.com/16741/pyu-rc0402-51-rohs-l-6-r-16741081.pdf?src-supplier=Future+Electronics, ComponentLink3URL=https://datasheet.ciiva.com/16741/pyu-rc0402-51-rohs-l-6-r-16741081.pdf?src-supplier=Future+Electronics, ComponentLink4Description=https://datasheet.ciiva.com/7849/1018594-7849882.pdf?src-supplier=Element14, ComponentLink4URL=https://datasheet.ciiva.com/7849/1018594-7849882.pdf?src-supplier=Element14, ComponentLink5Description=https://datasheet.ciiva.com/7849/1018594-7849883.pdf?src-supplier=Element14, ComponentLink5URL=https://datasheet.ciiva.com/7849/1018594-7849883.pdf?src-supplier=Element14, Construction=Rectangular, Depth=0.5mm, Features="Moisture Resistant", Height=0.32mm, Lead Free="Lead Free", Length=1mm, Manufacturer Part Number=RC0402FR-071ML, Military Standard=Not, Number of Terminations=2, Packaging="Tape and Reel", Power Rating=63mW, Pricing 1="1=0.10000, 10=0.01600, 100=0.00660, 1000=0.00299, 2500=0.00259, 5000=0.00214 (USD)", REACH SVHC=Unknown, RoHS=Yes, RoHS Compliant=Yes, Series=RC, Size Code=0402, Stock 1=3696366, Supplier 1=Digi-Key, Technology="THICK FILM", Termination=SMD/SMT, Tolerance=1%
R4: library part RC0402JR-0712KL, "12K OHM", Case Code (Imperial)=0402, Case Code (Metric)=1005, Manufacturer=Yageo, Max Operating Temperature=155°C, Max Power Dissipation=63mW, Min Operating Temperature=-55°C, Package Quantity=1, Resistance=12kR, Resistance Tolerance=5%, Resistor Type="Thick Film", Supplier Part Number 1=311-12KJRCT-ND, Temperature Coefficient=100ppm/°C, Voltage Rating=50V, Case/Package=0402, Category="Chip SMD Resistors", ComponentLink1Description=https://datasheet.ciiva.com/2452/pyu-r-int-thick-7-2452758.pdf?src-supplier=Digi-Key, ComponentLink1URL=https://datasheet.ciiva.com/2452/pyu-r-int-thick-7-2452758.pdf?src-supplier=Digi-Key, ComponentLink2Description=https://datasheet.ciiva.com/6168/1018594-6168998.pdf?src-supplier=Farnell, ComponentLink2URL=https://datasheet.ciiva.com/6168/1018594-6168998.pdf?src-supplier=Farnell, ComponentLink3Description=https://datasheet.ciiva.com/2452/pyu-r-int-thick-7-2452759.pdf?src-supplier=Digi-Key, ComponentLink3URL=https://datasheet.ciiva.com/2452/pyu-r-int-thick-7-2452759.pdf?src-supplier=Digi-Key, ComponentLink4Description=https://datasheet.ciiva.com/2452/pyu-r-int-thick-7-2452760.pdf?src-supplier=Digi-Key, ComponentLink4URL=https://datasheet.ciiva.com/2452/pyu-r-int-thick-7-2452760.pdf?src-supplier=Digi-Key, ComponentLink5Description=https://datasheet.ciiva.com/7983/1018594-7983548.pdf?src-supplier=Element14, ComponentLink5URL=https://datasheet.ciiva.com/7983/1018594-7983548.pdf?src-supplier=Element14, ComponentLink6Description=https://datasheet.ciiva.com/5558/pyu-rc0402-51-rohs-l-6-r-5558094.pdf?src-supplier=Mouser, ComponentLink6URL=https://datasheet.ciiva.com/5558/pyu-rc0402-51-rohs-l-6-r-5558094.pdf?src-supplier=Mouser, Construction=Rectangular, Depth=0.5mm, Features="Moisture Resistant", Height=0.016inch, Lead Free="Lead Free", Length=1mm, Manufacturer Part Number=RC0402JR-0712KL, Military Standard=Not, Number of Pins=2, Number of Terminations=2, Packaging="Tape and Reel", Power Rating=63mW, Pricing 1="1=0.10000, 10=0.01300, 100=0.00540, 1000=0.00244, 2500=0.00212, 5000=0.00175 (USD)", REACH SVHC="No SVHC", RoHS=Yes, RoHS Compliant=Yes, Series=RC, Size Code=0402, Stock 1=42769, Supplier 1=Digi-Key, Termination=SMD/SMT, Tolerance=5%, Voltage Rating (DC)=50V, Width=0.02inch
U1: "USB2514B-I/M2, USB Interface, USB Hub Controller, USB 2.0, 3 V, 3.6 V, SQFN, 36 Pins", Manufacturer=Microchip, Max Operating Temperature=85°C, Max Supply Voltage=3.6V, Min Operating Temperature=-40°C, Min Supply Voltage=3V, Operating Supply Current=70mA, Supplier Part Number 1=55Y4214, Category="Integrated Circuits (ICs)", ComponentLink1Description=http://www.farnell.com/datasheets/2032129.pdf?src-supplier=Farnell, ComponentLink1URL=http://www.farnell.com/datasheets/2032129.pdf?src-supplier=Farnell, ComponentLink2Description=http://www.farnell.com/datasheets/2032129.pdf?src-supplier=Element14, ComponentLink2URL=http://www.farnell.com/datasheets/2032129.pdf?src-supplier=Element14, ComponentLink3Description=http://www.microchip.com/mymicrochip/filehandler.aspx?ddocname=en562310&src-supplier=Digi-Key, ComponentLink3URL=http://www.microchip.com/mymicrochip/filehandler.aspx?ddocname=en562310&src-supplier=Digi-Key, Data Rate=480Mbps, Interface=USB, Lead Free="Lead Free", Manufacturer Part Number=USB2514B-I/M2, Number of Pins=36, Number of Ports=4, Packaging=Tray, Pricing 1="1=3.55000, 10=3.29000, 25=3.02000 (USD)", REACH SVHC="No SVHC", RoHS=Yes, RoHS Compliant=Yes, Supplier 1=Newark, USB Standard="USB 2.0"
U2: "MIC5504-3.3YM5-TR - LDO VOLT REG, 0.3A, 3.3V, SOT-23-5", Case/Package=SOT-23-5, Dropout Voltage=380mV, Manufacturer=Microchip, Max Input Voltage=5.5V, Max Operating Temperature=125°C, Max Output Current=300mA, Min Input Voltage=2.5V, Min Operating Temperature=-40°C, Nominal Output Voltage=3.3V, Operating Supply Current=42uA, Power Supply Rejection Ratio (PSRR)=60dB, Quiescent Current=38uA, Supplier Part Number 1=576-4764-1-ND, Accuracy=3%, Category="Voltage Regulators - Linear", ComponentLink1Description=https://datasheet.ciiva.com/46425/1856860-46425639.pdf?src-supplier=Element14, ComponentLink1URL=https://datasheet.ciiva.com/46425/1856860-46425639.pdf?src-supplier=Element14, Height=1.1mm, Length=2.9mm, Manufacturer Part Number=MIC5504-3.3YM5-TR, Mount="Surface Mount", Number of Outputs=1, Number of Pins=5, Output Current=300mA, Output Type=Fixed, Output Voltage=3.3V, Packaging="Tape and Reel", Pricing 1="1=0.13000, 25=0.09000, 100=0.08000 (USD)", REACH SVHC="No SVHC", RoHS=Yes, RoHS Compliant=No, Stock 1=77294, Supplier 1=Digi-Key, Width=1.6mm
X1: library part XRCGB24M000F0L00R0, "24MHZ", Case/Package=SMD/SMT, ESR (Equivalent Series Resistance)=150R, Frequency Stability=50ppm, Frequency Tolerance=100ppm, Load Capacitance=6pF, Manufacturer=Murata, Max Operating Temperature=85°C, Min Operating Temperature=-30°C, Operating Frequency="24 MHz", Package Quantity=3000, Supplier Part Number 1=490-5575-1-ND, Category=Crystals, ComponentLink1Description=https://datasheet.ciiva.com/3852/part15-3852009.pdf?src-supplier=Arrow+Electronics, ComponentLink1URL=https://datasheet.ciiva.com/3852/part15-3852009.pdf?src-supplier=Arrow+Electronics, ComponentLink2Description=https://datasheet.ciiva.com/852/p79e-852274.pdf?src-supplier=Digi-Key, ComponentLink2URL=https://datasheet.ciiva.com/852/p79e-852274.pdf?src-supplier=Digi-Key, ComponentLink3Description=https://datasheet.ciiva.com/852/p79e-852275.pdf?src-supplier=Digi-Key, ComponentLink3URL=https://datasheet.ciiva.com/852/p79e-852275.pdf?src-supplier=Digi-Key, ComponentLink4Description=https://datasheet.ciiva.com/852/p79e-852276.pdf?src-supplier=Digi-Key, ComponentLink4URL=https://datasheet.ciiva.com/852/p79e-852276.pdf?src-supplier=Digi-Key, ComponentLink5Description=https://datasheet.ciiva.com/1361/l0445e-1361516.pdf?src-supplier=Element14, ComponentLink5URL=https://datasheet.ciiva.com/1361/l0445e-1361516.pdf?src-supplier=Element14, ComponentLink6Description=https://datasheet.ciiva.com/22695/1911263-22695436.pdf?src-supplier=Element14, ComponentLink6URL=https://datasheet.ciiva.com/22695/1911263-22695436.pdf?src-supplier=Element14, Depth=1.6mm, Frequency=24MHz, Height=0.028inch, Lead Free="Lead Free", Length=2mm, Manufacturer Part Number=XRCGB24M000F0L00R0, Mount="Surface Mount", Number of Pins=4, Packaging="Tape and Reel", Pricing 1="1=0.32000, 10=0.26800, 50=0.24160, 100=0.21480, 500=0.20406, 1000=0.17184 (USD)", REACH SVHC="No SVHC", RoHS=Yes, RoHS Compliant=Yes, Series=XRCGB, Series Resistance=150R, Stock 1=26986, Supplier 1=Digi-Key, Termination=SMD/SMT, Tolerance=100ppm, Width=1.6mm

## Free pads (board coordinates)
  round 6.5 hole 4: 1(162.786,43.307) 2(223.442,43.307) 3(223.442,103.964) 4(162.786,103.964)

## Via types
v1: diameter 0.6, hole 0.3, Top Layer to Bottom Layer, 45 vias

## Nets (pads, with @x,y where several pads share a name; then routed paths per layer and width w, separated by ;. In a path a pad name is that pad's centre, name@x,y a point inside that pad or via, vN(x,y) a via of type N, cw(c..) or ccw(c..) an arc to the next point about the centre after c; other vN are vias at no path point)
3V3: C3.1 U1.5 U1.10 U1.15 U1.23 U1.26 U1.27 U1.29 U1.36 U2.4 | length 8.5
  Top Layer w0.2: 188.116,74.316 U1.5 ; U1.36 190.138,78.262 ; U1.29 193.668,77.161 193.668,77.836 194.332,78.5 ; v1@195.282,78.5 195.328,78.454 v1(195.352,78.454)
  Top Layer w0.3: 194.332,78.5 v1@195.282,78.5
  Top Layer w0.4: v1(186.5,73.1) 186.577,73.177 186.977,73.177 188.116,74.316
  Top Layer w0.5: v1(188.9,78.6) 189.8,78.6 190.138,78.262
  other v1: 190.5,67.9 190.5,69.2 197.1,76
+5V: C4.1 C5.1 C6.1 C7.1 J2.1 J3.1 J4.1 J5.1 J?.1 U2.1 U2.3
GND: C1.2 C2.2 C3.2 C4.2 C5.2 C6.2 C7.2 D1.1 D2.1 D3.1 D4.1 D5.1 D6.1 D7.1 D8.1 D9.1 D10.1 J2.4 J3.4 J4.4 J5.4 J?.4 J?.S1 J?.S2 R1.2 R3.2 R4.2 U1.22 U1.24 U1.37 U2.2 | length 33.8
  Top Layer w0.2: U2.2 U2.2@194.533,66.698 ; v1@195.998,66.698 v1(196,66.7) ; C6.2@199.985,71.2 C6.2 ; C7.2@199.99,69.7 C7.2 ; C4.2 C4.2@200.424,66.897
  Top Layer w0.254: v1(183.2,77.4) v1@183.294,77.4 ; v1(187.4,65.1) 187.4,65.194 v1@187.5,65.294 ; U1.22 192.638,73.816 v1(192.138,74.316) 192.638,74.816 U1.24
  Top Layer w0.3: v1(183.2,79.2) D3.1 ; v1@183.294,77.4 183.394,77.5 D4.1 ; v1(183.3,69.2) D8.1 ; v1(183.3,70.9) D7.1 ; v1(183.4,73.2) D6.1 ; v1(183.4,74.9) D5.1 ; v1@187.5,65.294 D9.1 ; v1(189.3,65.1) D10.1 ; R1.2 v1(202.1,75.6) ; D1.1 200.85,77.05 200.95,77.05 201.155,76.845 v1(202.1,76.845) ; D2.1 v1(202.1,78.9)
  Top Layer w0.5: v1(183.405,80.6) R4.2 ; C3.2 v1(193.876,69.196) ; U2.2@194.533,66.698 v1@195.998,66.698 ; v1(198.7,69.7) C7.2@199.99,69.7 ; v1(198.7,71.2) C6.2@199.985,71.2 ; C5.2 v1(198.8,68.1) ; C4.2@200.424,66.897 v1(200.424,68.104) ; R3.2 v1(202.1,73) ; v1(203.4,79.1) J?.4
  other v1: 207.04,65.6 208.37,65.6 209.7,65.6 205.71,65.7 193.1,73.3 191.1,73.4 191.1,75.3 193,75.3 185.95,82.1 198.4,82.1 185.95,83.1 198.4,83.1 205.71,85.39 207.04,85.39 208.37,85.39 209.7,85.39
IN_N: D2.2 J?.3 U1.31 | length 20.2
  Top Layer w0.381: U1.31 192.577,77.192 192.577,77.754 192.528,77.803 192.528,79.527 193.837,80.835 196.463,80.835 196.649,80.649 197.5,79.798 197.5,78.918 198.1,78.318 199.038,78.318 199.521,78.318 199.744,78.541 199.744,78.86 199.784,78.9 D2.2 199.819,78.9 200.131,78.588 200.131,78.569 200.4,78.3 202.378,78.3 203.579,77.099 203.579,76.141 203.802,75.918 204.117,75.918 204.341,76.141 204.341,76.341 204.6,76.6 J?.3
IN_P: D1.2 J?.2 U1.30 | length 18.7
  Top Layer w0.381: U1.30@193.138,77.491 193.138,77.514 193.163,77.54 193.163,79.264 194.1,80.2 196.2,80.2 196.865,79.535 196.865,78.654 197.837,77.683 198.775,77.683 199.52,77.683 199.744,77.459 199.744,77.141 199.784,77.1 D1.2 199.819,77.1 200.384,77.665 202.115,77.665 202.944,76.836 202.944,75.878 203.539,75.283 204.117,75.283 204.341,75.059 204.341,74.86 204.6,74.6 J?.2
NetC1_1: C1.1 R2.1 U1.32 X1.1 | length 11.6
  Top Layer w0.2: U1.32 192.138,79.759 192.19,79.81
  Top Layer w0.3: 192.19,79.81 193.655,81.276 194.974,81.276 195.15,81.451 C1.1 193.95,82.6 193.45,83.1 X1.1 192.875,83.675 192.644,83.906 R2.1
NetC2_1: C2.1 R2.2 U1.33 X1.3 | length 13.8
  Top Layer w0.254: U1.33 191.638,79.162
  Top Layer w0.3: X1.3 190.95,82.1 190.45,82.6 C2.1 ; 191.638,79.162 190.7,80.1 189.987,80.1 189.2,80.888 C2.1 ; R2.2 191.755,83.927 191.58,83.751 189.376,83.751 189.2,83.576 C2.1
NetR1_1: R1.1 U1.28 | length 7.3
  Top Layer w0.2: U1.28 194.138,77.551 194.387,77.8
  Top Layer w0.3: 194.387,77.8 197.097,77.8 198.45,76.447 198.45,76.1 198.95,75.6 R1.1
NetR3_1: R3.1 U1.25 | length 11.3
  Top Layer w0.25: U1.25 194.958,75.311 195.598,75.311 195.909,75 v1(196.3,75)
  Top Layer w0.5: v1(198.7,73) R3.1
  Bottom Layer w0.3: v1(196.3,75) 196.3,75.081 196,75.381 196,76.8 196.4,77.2 198.2,77.2 198.7,76.7 v1(198.7,73)
NetR4_1: R4.1 U1.35 | length 7.7
  Top Layer w0.2: U1.35@190.622,77.147 190.638,77.163 190.638,78.962
  Top Layer w0.3: R4.1 187.65,80.6 188.75,79.5 190.1,79.5 190.638,78.962
Out1_N: D4.2 J2.3 U1.2 | length 28.7
  Top Layer w0.2: D4.2 185.6,78.07 ; J2.3 189.238,90.763 189.238,88.463 189,88.225 183.665,88.225 181.775,86.335 181.775,78.978 182.565,78.188 184.313,78.188 185.483,78.188 185.6,78.07 ; U1.2 189.307,75.832 188.632,75.832 188.56,75.904 188.25,75.904 185.966,78.188 185.717,78.188 185.6,78.07
Out1_P: D3.2 J2.2 U1.1 | length 28.2
  Top Layer w0.2: D3.2 185.6,78.63 ; U1.1 189.307,76.3 188.632,76.3 188.56,76.229 188.385,76.229 186.101,78.513 185.717,78.513 185.6,78.63 ; J2.2 189.563,90.763 189.563,88.328 189.135,87.9 183.8,87.9 182.1,86.2 182.1,79.113 182.7,78.513 184.178,78.513 185.483,78.513 185.6,78.63
Out2_N: D6.2 J3.3 U1.4 | length 23.5
  Top Layer w0.2: J3.3 176.138,83.438 179.437,83.438 180.275,82.6 180.275,75.678 182.065,73.887 184.062,73.887 185.483,73.888 185.6,73.77 ; D6.2 185.6,73.77 ; U1.4 189.307,74.832 188.632,74.832 188.56,74.904 187.751,74.904 186.735,73.888 185.717,73.888 185.6,73.77
Out2_P: D5.2 J3.2 U1.3 | length 23.5
  Top Layer w0.2: J3.2 176.137,83.763 179.572,83.763 180.6,82.735 180.6,75.812 182.2,74.212 183.928,74.212 185.483,74.213 185.6,74.33 ; D5.2 185.6,74.33 ; U1.3 189.307,75.3 188.632,75.3 188.56,75.229 187.616,75.229 186.6,74.213 185.717,74.213 185.6,74.33
Out3_N: D8.2 J4.3 U1.7 | length 21.8
  Top Layer w0.2: J4.3 176.238,64.338 180.972,64.338 181.6,64.965 181.6,68.988 182.5,69.888 184.212,69.888 185.483,69.888 185.6,69.77 ; D8.2 185.6,69.77 ; U1.7 189.307,73.332 188.632,73.332 188.56,73.404 188.395,73.404 187.321,72.33 187.321,71.191 186.017,69.888 185.717,69.888 185.6,69.77
Out3_P: D7.2 J4.2 U1.6 | length 21.8
  Top Layer w0.2: J4.2 176.237,64.663 180.837,64.663 181.275,65.1 181.275,69.122 182.365,70.213 184.078,70.213 185.483,70.213 185.6,70.33 ; D7.2 185.6,70.33 ; U1.6 189.307,73.8 188.632,73.8 188.56,73.729 188.26,73.729 186.996,72.464 186.996,71.326 185.883,70.213 185.717,70.213 185.6,70.33
Out4_N: D10.2 J5.3 U1.9 | length 17.7
  Top Layer w0.2: D10.2 188.68,67.8 ; U1.9 189.307,72.332 188.632,72.332 188.611,72.353 188.445,72.353 188.328,72.236 188.328,70.297 188.562,70.063 188.562,67.917 188.68,67.8 ; J5.3 189.562,58.038 189.562,59.322 188.562,60.322 188.562,67.683 188.68,67.8
Out4_P: D9.2 J5.2 U1.8 | length 18.3
  Top Layer w0.2: D9.2 188.12,67.8 ; J5.2 189.237,58.038 189.237,59.188 188.237,60.188 188.237,67.683 188.12,67.8 ; U1.8 189.307,72.8 188.632,72.8 188.509,72.678 188.311,72.678 188.003,72.37 188.003,70.163 188.237,69.928 188.237,67.917 188.12,67.8
pads on no net: J2.SH1 J2.SH2 J3.SH1 J3.SH2 J4.SH1 J4.SH2 J5.SH1 J5.SH2 J?. U1.11 U1.12 U1.13 U1.14 U1.16 U1.17 U1.18 U1.19 U1.20 U1.21 U1.34 U2.5 X1.2 X1.4

## Polygon pours and split planes (outlines as drawn)
GND on Top Layer "GND_L01_P007" (solid, pour order 7): 171,101 215,101 220,96 220,52 214.5,46.5 170.5,46.5 166,51 166,96
3V3 on Top Layer "3V3_L01_P000" (solid, pour order 0): 189.9,72 190.05,72.15 190.2,72.15 190.35,72 190.35,70.8 190.5,70.65 192.3,70.65 192.45,70.8 192.45,72 192.6,72.15 192.75,72.15 192.9,72 192.9,70.8 193.05,70.65 195.9,70.65 196.2,70.95 196.2,73.8 195.9,74.1 194.4,74.1 194.25,74.25 194.25,74.4 194.4,74.55 196.95,74.55 197.1,74.7 197.1,75.15 196.65,75.6 194.5,75.6 194.3,75.8 194.3,76.401 194.499,76.6 197.75,76.6 198,76.35 198,70.25 197.65,69.9 192.45,69.9 192.3,69.75 192.3,68.7 192.45,68.55 193.05,68.55 193.2,68.4 193.2,66.9 193.05,66.75 190.2,66.75 189.9,67.05
GND on Top Layer "GND_L01_P005" (solid, pour order 5): 199.1,81.7 198.85,81.45 196.35,81.45 196.1,81.7 196.1,83.45 196.35,83.7 198.85,83.7 199.1,83.45
GND on Top Layer "GND_L01_P004" (solid, pour order 4): 210.35,64.95 211.1,65.7 211.1,69.7 210.6,70.2 204.85,70.2 204.35,69.7 204.35,65.7 205.1,64.95
GND on Top Layer "GND_L01_P003" (solid, pour order 3): 205.25,86.25 204.5,85.5 204.5,81.5 205,81 210.75,81 211.25,81.5 211.25,85.5 210.5,86.25
GND on Top Layer "GND_L01_P002" (solid, pour order 2): 185.25,83.5 185.5,83.75 188,83.75 188.25,83.5 188.25,81.75 188,81.5 185.5,81.5 185.25,81.75
+5V on Top Layer "+5V_L01_P001" (solid, pour order 1): 193.75,64.75 193.5,65 193.5,66 193.75,66.25 196.5,66.25 196.75,66.5 196.75,67 196.5,67.25 193.75,67.25 193.5,67.5 193.5,68.25 193.75,68.5 197.5,68.5 197.75,68.25 197.75,66.5 198,66.25 201,66.25 201.5,66.75 201.5,68.5 201.25,68.75 200.75,68.75 200.5,69 200.5,71.75 201,72.25 203,72.25 204,73.25 207,73.25 207.75,72.5 207.75,71 207.25,70.5 203.5,70.5 203,70 203,48 201.5,46.5 170,46.5 166.5,50 166.5,95.5 171.5,100.5 193,100.5 194,99.5 194,90.5 193.5,90 192,90 191.5,90.5 191.5,96 190.5,97 174,97 170.5,93.5 170.5,89 171.5,88 176.5,88 177,87.5 177,86 176.5,85.5 171,85.5 169.5,84 169.5,70 170.5,69 177,69 177.5,68.5 177.5,67 177,66.5 170.5,66.5 169.5,65.5 169.5,53.5 172.5,50.5 183,50.5 184.5,52 184.5,58.5 185,59 187,59 188,58 188,51.5 189,50.5 197.5,50.5 198.5,51.5 198.5,64.25 198,64.75
GND on Bottom Layer "GND_L02_P008" (solid, pour order 8): 166,96 171,101 215,101 220,96 220,52 214.5,46.5 170.5,46.5 166,51
3V3 on Bottom Layer "3V3_L02_P006" (solid, pour order 6): 195.75,78 196,78.25 196,79.75 195.75,80 186,80 185.25,79.25 185.25,67.75 186,67 190.75,67 191.25,67.5 191.25,69.5 190.75,70 187.25,70 187,70.25 187,77.5 187.5,78

## Silkscreen, mask and mechanical layers (free items; w line width, h text height)
Top Overlay:
  text "4 Port" at 201.4,97.9 h2
  text "Output1" at 185.754,96.762 h1.52
  text "USB Hub" at 201.4,94.4 h2
  text "V1I1" at 201.4,90.4 h2
  text "Output2" at 170.238,79.254 h1.52 r90
  text "Input" at 211.254,66.762 h1.52
  text "Output3" at 170.238,60.254 h1.52 r90
  text "Output4" at 184.754,51.262 h1.52
Bottom Overlay:
  rectangle: 191,47 207,50
  text "4 Port USB Hub_V1I1" at 210.1,98.233 h2
  text "Q.C." at 212.246,47.754 h1.52
Mechanical 1:
  lines w0.013: 162.078,49.671 159.25,46.843 ccw(c162.786,43.307) 166.321,39.772 169.15,42.6 172.685,46.136
Documentation:
  lines w0.013: 159.25,46.843 ccw(c162.786,43.307) 166.321,39.772 ; 159.25,46.843 ccw(c162.786,43.307) 166.321,39.772 ; 159.25,46.843 162.078,49.671 ; 159.25,46.843 162.078,49.671 ; 159.25,100.429 cw(c162.786,103.964) 166.321,107.5 ; 159.25,100.429 cw(c162.786,103.964) 166.321,107.5 ; 159.25,100.429 162.078,97.6 ; 159.25,100.429 162.078,97.6 ; 162.078,49.671 165.614,53.207 ; 162.078,49.671 165.614,53.207 ; 162.078,97.6 165.614,94.065 ; 162.078,97.6 165.614,94.065 ; 165.614,53.207 165.614,94.065 ; 165.614,53.207 165.614,94.065 ; 166.321,39.772 169.15,42.6 ; 166.321,39.772 169.15,42.6 ; 166.321,107.5 169.15,104.671 ; 166.321,107.5 169.15,104.671 ; 169.15,42.6 172.685,46.136 ; 169.15,42.6 172.685,46.136 ; 169.15,104.671 172.685,101.136 ; 169.15,104.671 172.685,101.136 ; 172.685,46.136 213.543,46.136 ; 172.685,46.136 213.543,46.136 ; 172.685,101.136 213.543,101.136 ; 172.685,101.136 213.543,101.136 ; 213.543,46.136 217.078,42.6 ; 213.543,46.136 217.078,42.6 ; 213.543,101.136 217.078,104.671 ; 213.543,101.136 217.078,104.671 ; 217.078,42.6 219.907,39.772 ; 217.078,42.6 219.907,39.772 ; 217.078,104.671 219.907,107.5 ; 217.078,104.671 219.907,107.5 ; 219.907,39.772 ccw(c223.442,43.307) 226.978,46.843 ; 219.907,39.772 ccw(c223.442,43.307) 226.978,46.843 ; 219.907,107.5 cw(c223.442,103.964) 226.978,100.429 ; 219.907,107.5 cw(c223.442,103.964) 226.978,100.429 ; 220.614,53.207 220.614,94.065 ; 220.614,53.207 224.15,49.671 ; 220.614,53.207 224.15,49.671 ; 220.614,53.207 220.614,94.065 ; 220.614,94.065 224.15,97.6 ; 220.614,94.065 224.15,97.6 ; 224.15,49.671 226.978,46.843 ; 224.15,49.671 226.978,46.843 ; 224.15,97.6 226.978,100.429 ; 224.15,97.6 226.978,100.429
  lines w0.4: 153.566,118.896 167.364,118.896 198.488,118.896 218.617,118.896 240.411,118.896 ; 153.566,122.896 167.364,122.896 198.488,122.896 218.617,122.896 240.411,122.896 ; 153.566,126.896 167.364,126.896 198.488,126.896 218.617,126.896 240.411,126.896 ; 153.566,130.896 167.364,130.896 198.488,130.896 218.617,130.896 240.411,130.896 ; 153.566,134.896 167.364,134.896 198.488,134.896 218.617,134.896 240.411,134.896 ; 153.566,138.896 167.364,138.896 198.488,138.896 218.617,138.896 240.411,138.896 ; 153.566,142.896 240.411,142.896 ; 167.364,146.896 167.364,114.896 ; 198.488,146.896 198.488,114.896 ; 218.617,146.896 218.617,114.896 ; 167.364,114.896 198.488,114.896 ; 167.364,114.896 153.566,114.896 153.566,146.896 240.411,146.896 240.411,114.896 218.617,114.896 ; 198.488,114.896 218.617,114.896
  text "Layer" at 155.966,143.896 h2
  text "Name" at 169.764,143.896 h2
  text "Material" at 200.888,143.896 h2
  text "Thickness" at 221.017,143.896 h2
  text "Top Overlay" at 169.764,139.896 h2
  text "Top Solder" at 169.764,135.896 h2
  text "SM-001" at 200.888,135.896 h2
  text "0.025mm" at 221.017,135.896 h2
  text "1" at 155.966,131.896 h2
  text "Top Layer" at 169.764,131.896 h2
  text "Copper" at 200.888,131.896 h2
  text "0.035mm" at 221.017,131.896 h2
  text "Dielectric 1" at 169.764,127.896 h2
  text "Core-043" at 200.888,127.896 h2
  text "1.499mm" at 221.017,127.896 h2
  text "2" at 155.966,123.896 h2
  text "Bottom Layer" at 169.764,123.896 h2
  text "Copper" at 200.888,123.896 h2
  text "0.035mm" at 221.017,123.896 h2
  text "Bottom Solder" at 169.764,119.896 h2
  text "SM-001" at 200.888,119.896 h2
  text "0.025mm" at 221.017,119.896 h2
  text "Bottom Overlay" at 169.764,115.896 h2
Board Outline:
  the board outline again, w0.013

## Text inside footprints (layer, text, board x,y; h text height)
J?: Mechanical 13 "PCB EDGE" at 218.9,72.1 h1.02 r90